# Altium PCB Electromagnetic Detection Board.PcbDoc
Units mm, origin at the board's own origin, x right, y up, seen from the top; angles counter-clockwise.
Board outline 99.95 x 7.87 mm, 2 copper layers (Top Layer, Bottom Layer); 9 components, 5 nets, 22 pads, 0 vias.
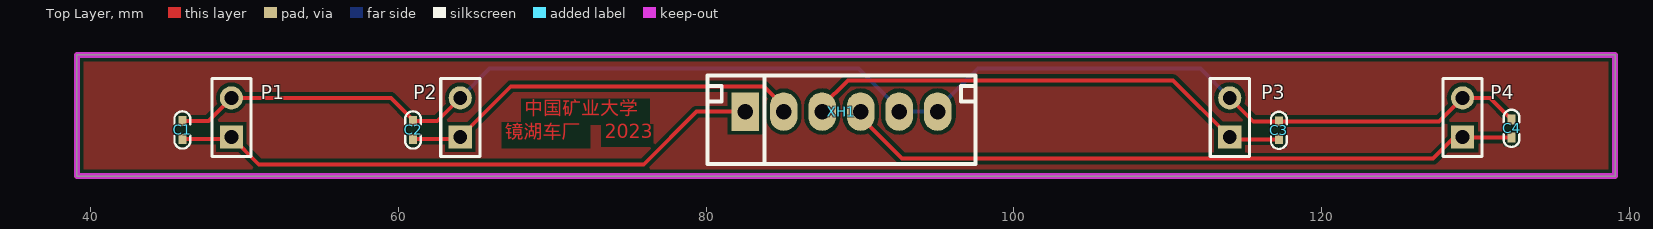
[diagram p0: Top Layer view]
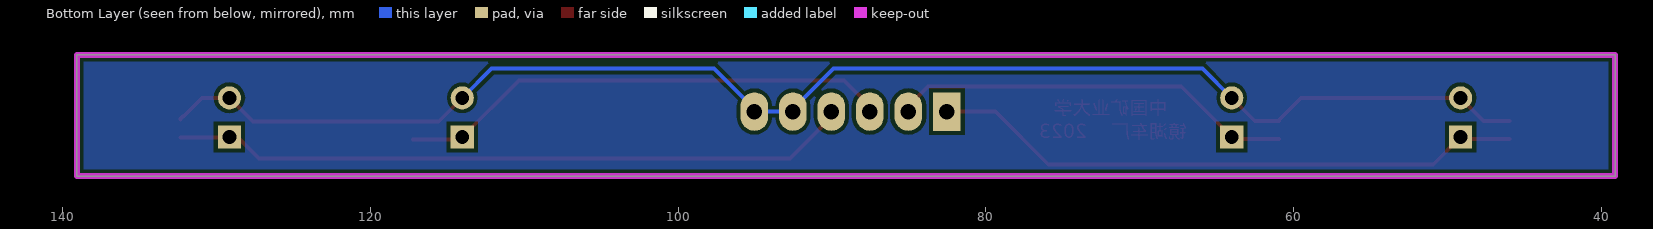
[diagram p1: Bottom Layer view, seen from below]
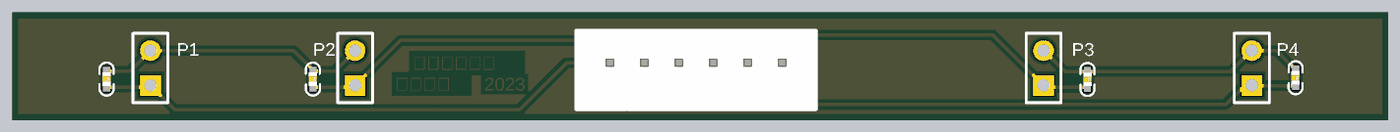
[diagram p2: 3D render of the assembled board from above, using the file's embedded part models]

## Layer stack, top to bottom
Top Solder: solder mask 0.0102, Solder Resist, Dk 3.5
Top Layer: signal copper 0.0356
Dielectric 1: dielectric 0.32, FR-4, Dk 4.8
Bottom Layer: signal copper 0.0356
Bottom Solder: solder mask 0.0102, Solder Resist, Dk 3.5

## Board outline
39.116,43.561 139.065,43.561 139.065,51.435 39.116,51.435

## Design rules (kind name [scope] priority, off if disabled: settings)
Clearance [All] p1: gap=0.254 ignorepadtopadclearanceinfootprint=FALSE except(0: Arc-Hole Track-Hole SMDPad-Hole THPad-Hole Via-Hole Fill-Hole Poly-Hole Region-Hole Text-Hole)
PolygonConnect [All] p1: connectstyle=Relief reliefconductorwidth=0.254 reliefentries=4 polygonreliefangle="90 Angle" airgapwidth=0.254
RoutingVias [All] p1: holewidth=0.711 width=1.27 viastyle="Through Hole" minholewidth=0.711 minwidth=1.27 maxholewidth=0.711 maxwidth=1.27
SolderMaskExpansion [All] p1: expansion=0.102
Width [All] p1: maxlimit=0.254 minlimit=0.254 preferedwidth=0.254
30 further rules are at their usual default settings.

## Components (designator, comment, footprint, x,y, rotation, side; value= is the part's Value field where it differs from the comment)
C1 "6.8nF" 0402C 45.97,47.193 r270 top
C2 "6.8nF" 0402C 60.956,47.193 r270 top
C3 "6.8nF" 0402C 117.217,47.168 r270 top
C4 "6.8nF" 0402C 132.33,47.295 r270 top
P1 "Header 2" HDR1X2 49.154,46.101 r90 top
P2 "Header 2" HDR1X2 64.027,46.101 r90 top
P3 "Header 2" HDR1X2 114.027,46.101 r90 top
P4 "Header 2" HDR1X2 129.154,46.101 r90 top
XH1 "XH6" XH6/2.54mm/180 82.543,47.752 r0 top

## Footprints (in the part's own frame and the unit in brackets; to place one, negate y for a bottom-side part, rotate by r counter-clockwise, add the part's x,y. Pads: shape width x height; smd on the part's side, far side on the other; paste and mask are expansions set on the pad)
0402C [mil]
  rect 25x20 smd: 1(2,0.16) 2(48,0.16)
  silkscreen extent -23,-20 73,20, body extent 5,-12 45,12, height 8
HDR1X2 [mm] "Connector; Header; 2 Position"
  rect 1.5x1.5 hole 0.9: 1(0,0)
  round 1.5 hole 0.9: 2(2.54,0)
  silkscreen extent -1.27,-1.27 3.81,1.27
XH6/2.54mm/180 [mm]
  rect 1.8x2.5 hole 1: 1(0,0)
  oval 1.8x2.5 hole 1: 2(2.5,0) 3(5,0) 4(7.5,0) 5(10,0) 6(12.5,0)
  silkscreen extent -2.45,-3.4 14.95,2.35, body extent -2.45,-3.4 14.95,2.35, height 7

## Part data
C1 C2 C3 C4: library part CAP, "无极性电容"
P1 P2 P3 P4: "Header, 2-Pin", LatestRevisionDate=17-Jul-2002, LatestRevisionNote="Re-released for DXP Platform.", Publisher="Altium Limited"

## Nets (pads, with @x,y where several pads share a name; then routed paths per layer and width w, separated by ;. In a path a pad name is that pad's centre, name@x,y a point inside that pad or via, vN(x,y) a via of type N, cw(c..) or ccw(c..) an arc to the next point about the centre after c; other vN are vias at no path point)
AGND: C1.1 C2.1 C3.1 C4.1 P1.2 P2.2 P3.2 P4.2 XH1.5 XH1.6 | length 94.2
  Top Layer w0.254: C1.1 47.655,47.142 P1.2 59.525,48.641 60.96,47.206 C2.1 62.528,47.142 P2.2 ; P3.2 115.551,47.117 C3.1 127.63,47.117 P4.2 130.937,48.641 132.143,47.434 132.207,47.434 132.334,47.307 C4.1
  Bottom Layer w0.254: P2.2 65.932,50.546 89.916,50.546 92.543,47.919 XH1.5 XH1.6 95.043,47.926 97.663,50.546 112.122,50.546 P3.2
IN1: C1.2 P1.1 XH1.1 | length 38.8
  Top Layer w0.254: C1.2 49.027,45.974 P1.1 50.932,44.323 75.946,44.323 79.375,47.752 XH1.1
IN2: C2.2 P2.1 XH1.2 | length 26.4
  Top Layer w0.254: C2.2 63.9,45.974 P2.1 67.309,49.383 83.762,49.383 85.043,48.102 XH1.2
IN3: C3.2 P3.1 XH1.3 | length 32.3
  Top Layer w0.254: XH1.3 87.543,48.102 89.225,49.784 110.344,49.784 P3.1 114.179,45.949 C3.2
IN4: C4.2 P4.1 XH1.4 | length 44.3
  Top Layer w0.254: XH1.4 90.043,47.402 92.741,44.704 127.242,44.704 128.639,46.101 P4.1 129.179,46.076 C4.2

## Polygon pours and split planes (outlines as drawn)
no net on Bottom Layer (solid, pour order 2): 39.116,51.435 39.116,43.561 139.065,43.561 139.065,51.435
no net on Top Layer (solid, pour order 4): 39.116,51.435 139.065,51.435 139.065,43.561 39.116,43.561

## Keep-outs
Keep-Out Layer:
  lines w0.381: 39.116,43.561 139.065,43.561 139.065,51.435 113.189,51.435 63.214,51.435 39.116,51.435 39.116,43.561

## Other copper
Top Layer:
  text "中国矿业大学" at 68.199,47.244 h1.52
  text "镜湖车厂" at 66.929,45.72 h1.52
  text "2023" at 73.406,45.72 h1.52